# Altium PCB temperatureSensor.PcbDoc (part 3 of 3)
Units mm, origin at the board's own origin, x right, y up, seen from the top; angles counter-clockwise.
Board outline 80 x 46 mm, 2 copper layers (Top Layer, Bottom Layer); 50 components, 32 nets, 187 pads, 128 vias.
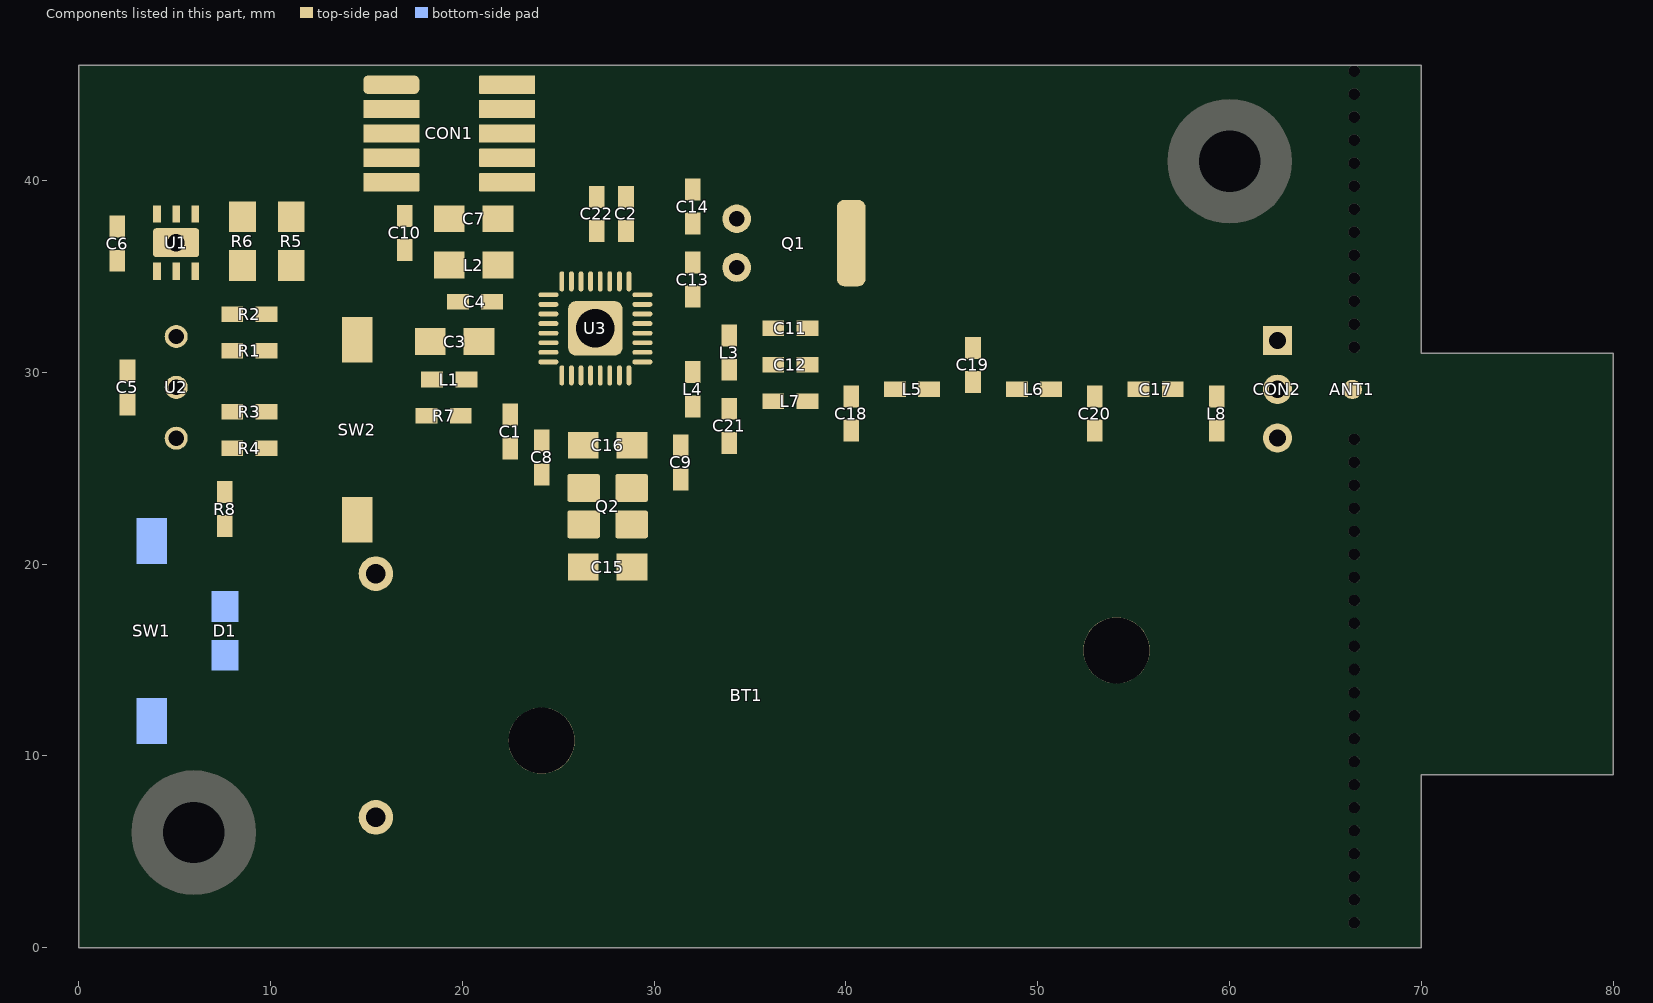
[diagram p3: the components of this part, seen from the top]

## Polygon pours and split planes (outlines as drawn) (continued)
GND on Top Layer "GND_L01_P010" (solid, remove dead copper, pour order 10): 0,0 18,0 18,14.7 21.1,17.8 21.4,18.1 65.9,18.1 65.9,22 65.9,22.1 65.4,22.1 32.7,22.1 32.2,22.1 31.6,22.7 28.7,25.6 28.7,32.7 29.6,33.6 32.9,33.6 45,33.6 48.2,36.8 48.5,37.1 65.3,37.1 65.7,37.1 65.9,37.1 65.9,46 0,46
GND on Bottom Layer "GND_L02_P006" (solid, remove dead copper, pour order 6): 0,0 65.9,0 65.9,46 0,46

## Keep-outs
Keep-Out Layer:
  the board outline again, w0.1

## Other copper
Top Layer:
  text "TOP" at 20,1 h2.5
Bottom Layer:
  text "BOT" at 20,1 h2.5

## Silkscreen, mask and mechanical layers (free items; w line width, h text height)
Top Overlay:
  drawing of 1660 lines, arcs and shapes, not listed
  text "temperatureSensor / V1 / PKAP 2017" at 27.4,0.8 h1.52
Bottom Overlay:
  drawing of 1658 lines, arcs and shapes, not listed
  text "temperatureSensor / V1" at 56.2,26 h1.52

## Text inside footprints (layer, text, board x,y; h text height)
BT1: Bottom Overlay "AAA" at 43.49,16.145 h3; Bottom Overlay "AAA" at 43.49,6.145 h3